# Altium PCB HX-SMJ-03-A.pcbdoc (part 1 of 2)
Units mil, origin at the board's own origin, x right, y up, seen from the top; angles counter-clockwise.
Board outline 10466.23 x 2984.91 mil, 2 copper layers (Top Layer, Bottom Layer); 269 components, 182 nets, 710 pads, 382 vias.
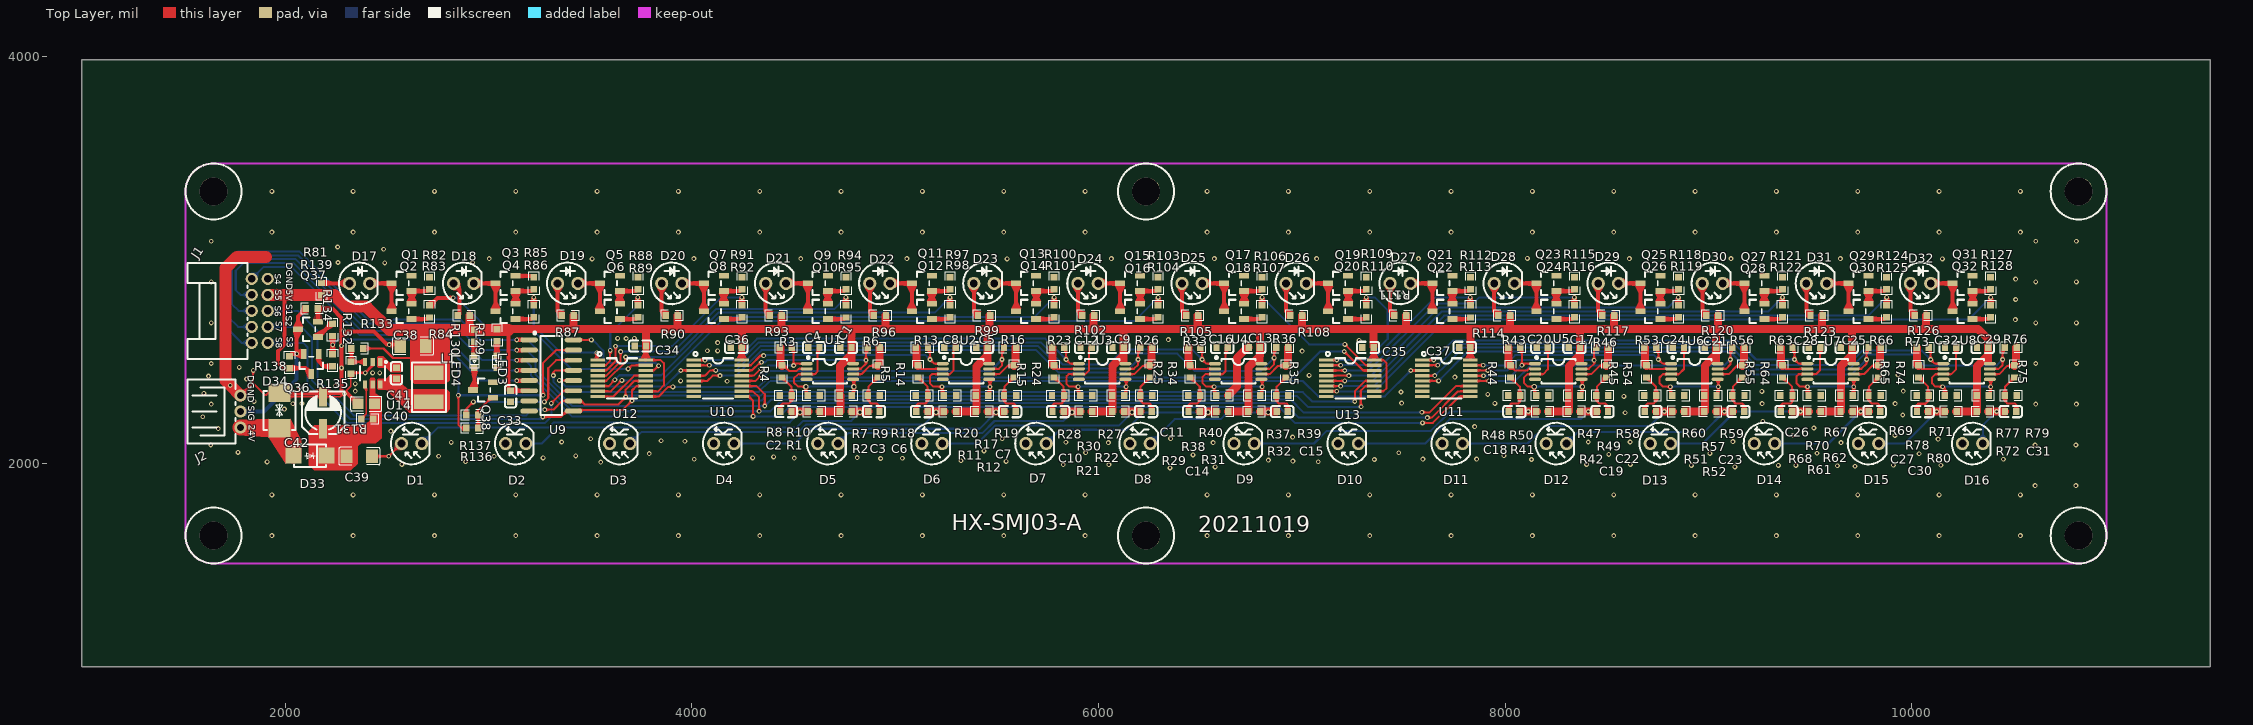
[diagram p0: Top Layer view]
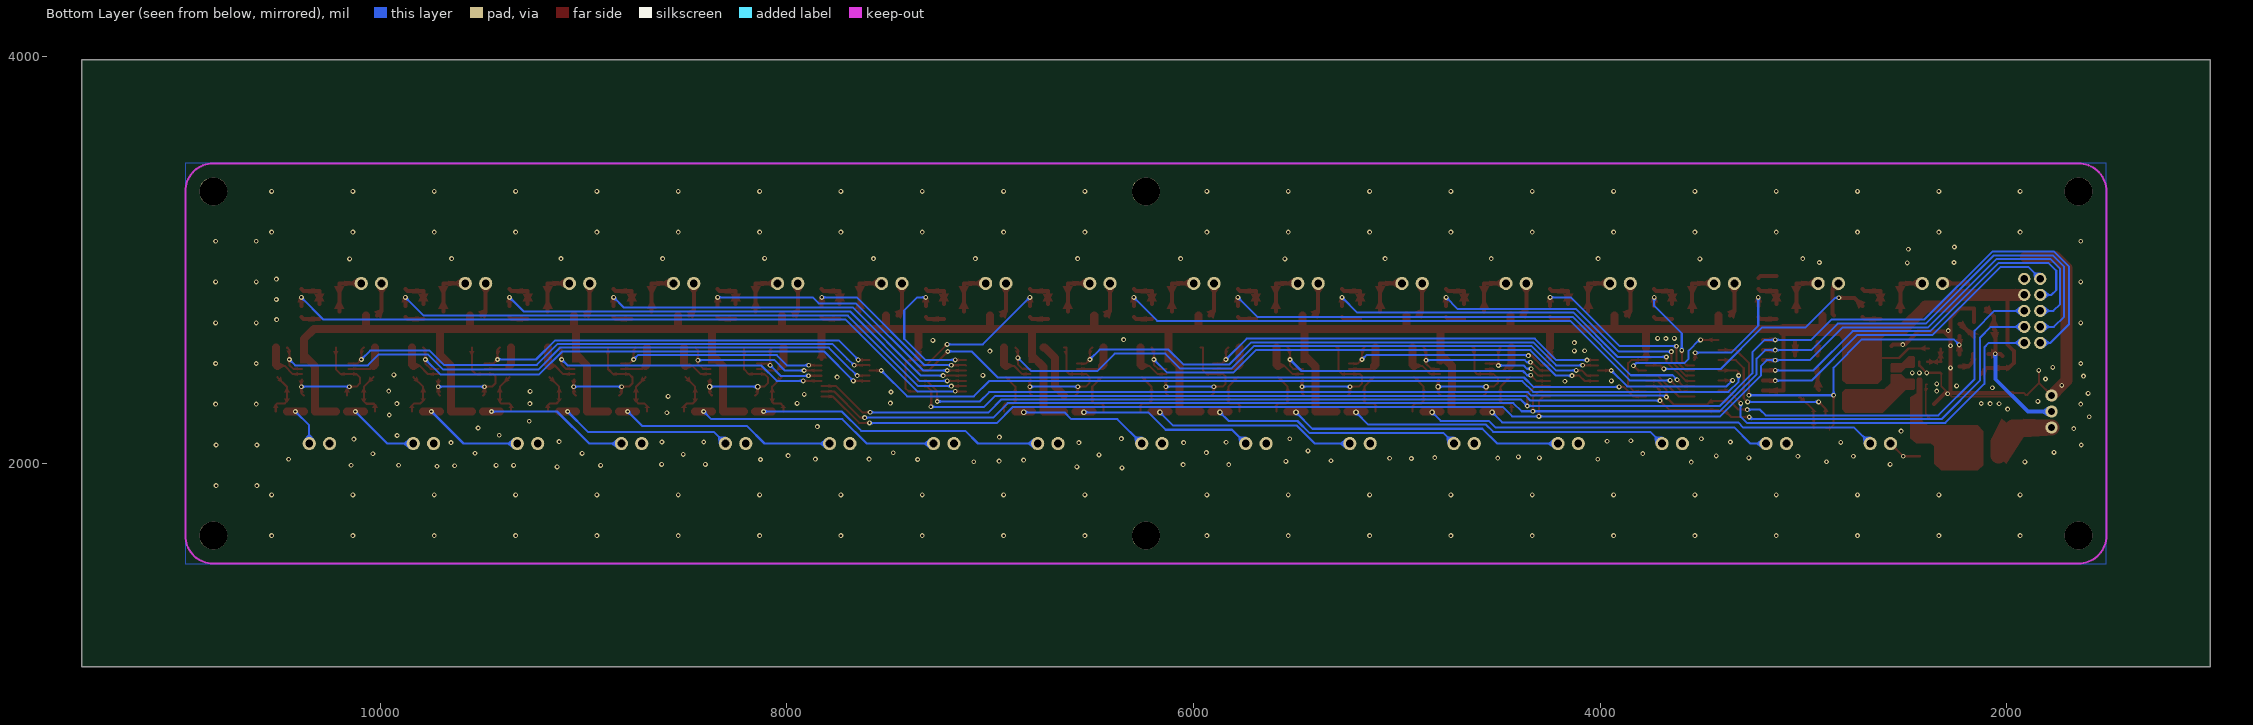
[diagram p1: Bottom Layer view, seen from below]

## Layer stack, top to bottom
Top Layer: signal copper (thickness not stored)
Dielectric: dielectric 12.6, FR-4, Dk 4.8
Bottom Layer: signal copper (thickness not stored)

## Board outline
11466.23,1000 1000,1000 1000,3984.91 11466.23,3984.91

## Components (designator, comment, footprint, x,y, rotation, side; value= is the part's Value field where it differs from the comment)
C1 "100nF" C0603 4757.33,2571.02 r180 top
C2 "1uF" C0603 4462.03,2256.02 r180 top
C3 "1uF" C0603 4895.03,2256.02 r180 top
C4 "100nF" C0603 4599.83,2571.02 r180 top
C5 "100nF" C0603 5426.53,2571.02 r180 top
C6 "1uF" C0603 5131.33,2256.02 r180 top
C7 "1uF" C0603 5564.33,2256.02 r180 top
C8 "100nF" C0603 5269.13,2571.02 r180 top
C9 "100nF" C0603 6095.83,2571.02 r180 top
C10 "1uF" C0603 5800.63,2256.02 r180 top
C11 "1uF" C0603 6233.63,2256.02 r180 top
C12 "100nF" C0603 5938.33,2571.02 r180 top
C13 "100nF" C0603 6765.13,2571.02 r180 top
C14 "1uF" C0603 6469.83,2256.02 r180 top
C15 "1uF" C0603 6902.93,2256.02 r180 top
C16 "100nF" C0603 6607.63,2571.02 r180 top
C17 "100nF" C0603 8339.93,2571.02 r180 top
C18 "1uF" C0603 8044.73,2256.02 r180 top
C19 "1uF" C0603 8477.73,2256.02 r180 top
C20 "100nF" C0603 8182.43,2571.02 r180 top
C21 "100nF" C0603 9009.23,2571.02 r180 top
C22 "1uF" C0603 8713.93,2256.02 r180 top
C23 "1uF" C0603 9147.03,2256.02 r180 top
C24 "100nF" C0603 8851.73,2571.02 r180 top
C25 "100nF" C0603 9678.53,2571.02 r180 top
C26 "1uF" C0603 9383.23,2256.02 r180 top
C27 "1uF" C0603 9816.33,2256.02 r180 top
C28 "100nF" C0603 9521.03,2571.02 r180 top
C29 "100nF" C0603 10347.83,2571.02 r180 top
C30 "1uF" C0603 10052.53,2256.02 r180 top
C31 "1uF" C0603 10485.63,2256.02 r180 top
C32 "100nF" C0603 10190.33,2571.02 r180 top
C33 "100nF" C0603 3108.03,2331.22 r90 top
C34 "100nF" C0603 3746.23,2578 r0 top
C35 "100nF" C0603 7325.23,2571.02 r0 top
C36 "100nF" C0603 4218.03,2571.02 r0 top
C37 "100nF" C0603 7801.13,2571.02 r0 top
C38 "47uF" C1206 2628.23,2578 r0 top
C39 "22uF" C1206 2364.23,2036 r180 top
C40 "100nF" C0805 2398.23,2294 r0 top
C41 "100nF" C0603 2546.23,2444 r270 top
C42 "22uF" CAP-SMD_BD5.0-L5.3-W5.3-FD 2186.23,2250 r90 top
D1 "PT334-6B" IR-5MM/2.54-PT334-6B 2621.44,2098.55 r90 top
D2 "PT334-6B" IR-5MM/2.54-PT334-6B 3133.25,2098.55 r90 top
D3 "PT334-6B" IR-5MM/2.54-PT334-6B 3645.07,2098.55 r90 top
D4 "PT334-6B" IR-5MM/2.54-PT334-6B 4156.88,2098.55 r90 top
D5 "PT334-6B" IR-5MM/2.54-PT334-6B 4668.69,2098.55 r90 top
D6 "PT334-6B" IR-5MM/2.54-PT334-6B 5180.5,2098.55 r90 top
D7 "PT334-6B" IR-5MM/2.54-PT334-6B 5692.31,2098.55 r90 top
D8 "PT334-6B" IR-5MM/2.54-PT334-6B 6204.12,2098.55 r90 top
D9 "PT334-6B" IR-5MM/2.54-PT334-6B 6715.93,2098.55 r90 top
D10 "PT334-6B" IR-5MM/2.54-PT334-6B 7227.74,2098.55 r90 top
D11 "PT334-6B" IR-5MM/2.54-PT334-6B 7739.55,2098.55 r90 top
D12 "PT334-6B" IR-5MM/2.54-PT334-6B 8251.36,2098.55 r90 top
D13 "PT334-6B" IR-5MM/2.54-PT334-6B 8763.18,2098.55 r90 top
D14 "PT334-6B" IR-5MM/2.54-PT334-6B 9274.99,2098.55 r90 top
D15 "PT334-6B" IR-5MM/2.54-PT334-6B 9786.8,2098.55 r90 top
D16 "PT334-6B" IR-5MM/2.54-PT334-6B 10298.6,2098.55 r90 top
D17 "IR333C-A" "IR-5MM/2.54-IR333C-A COPY" 2365.54,2885.96 r90 top
D18 "IR333C-A" "IR-5MM/2.54-IR333C-A COPY" 2877.35,2885.96 r90 top
D19 "IR333C-A" "IR-5MM/2.54-IR333C-A COPY" 3389.17,2885.96 r90 top
D20 "IR333C-A" "IR-5MM/2.54-IR333C-A COPY" 3900.97,2885.96 r90 top
D21 "IR333C-A" "IR-5MM/2.54-IR333C-A COPY" 4412.77,2885.96 r90 top
D22 "IR333C-A" "IR-5MM/2.54-IR333C-A COPY" 4924.57,2885.96 r90 top
D23 "IR333C-A" "IR-5MM/2.54-IR333C-A COPY" 5436.4,2885.96 r90 top
D24 "IR333C-A" "IR-5MM/2.54-IR333C-A COPY" 5948.21,2885.96 r90 top
D25 "IR333C-A" "IR-5MM/2.54-IR333C-A COPY" 6460.02,2885.96 r90 top
D26 "IR333C-A" "IR-5MM/2.54-IR333C-A COPY" 6971.84,2885.96 r90 top
D27 "IR333C-A" "IR-5MM/2.54-IR333C-A COPY" 7483.65,2885.96 r90 top
D28 "IR333C-A" "IR-5MM/2.54-IR333C-A COPY" 7995.47,2885.96 r90 top
D29 "IR333C-A" "IR-5MM/2.54-IR333C-A COPY" 8507.27,2885.96 r90 top
D30 "IR333C-A" "IR-5MM/2.54-IR333C-A COPY" 9019.07,2885.96 r90 top
D31 "IR333C-A" "IR-5MM/2.54-IR333C-A COPY" 9530.87,2885.96 r90 top
D32 "IR333C-A" "IR-5MM/2.54-IR333C-A COPY" 10042.7,2885.96 r90 top
D33 "SS24" SMA_L4.3-W2.6-LS5.2-FD 2121.23,2039 r0 top
D34 "P6SMB24CA" SMB_L4.6-W3.6-LS5.3-BI 1971.23,2261 r270 top
J1 "PHB-2*5AW" CONN-TH_PHB-2*5AW 1874.23,2750.96 r90 top
J2 "PH-3AW" CONN-TH_PH-3AW 1779.26,2256.06 r270 top
L1 "4.7uH" 4030 2706.23,2375 r90 top
LED3 "D-G060306G1-KS2" LED_0603 3040.23,2501 r270 top
LED4 "D-G060306G1-KS2" LED_0603 2930.23,2501 r270 top
Q1 "S9014" SOT-23(SOT-23-3) 2572.23,2885.97 r90 top
Q2 "S9014" SOT-23(SOT-23-3) 2572.23,2748.17 r90 top
Q3 "S9014" SOT-23(SOT-23-3) 3084.04,2885.97 r90 top
Q4 "S9014" SOT-23(SOT-23-3) 3084.04,2748.17 r90 top
Q5 "S9014" SOT-23(SOT-23-3) 3595.85,2885.97 r90 top
Q6 "S9014" SOT-23(SOT-23-3) 3595.85,2748.17 r90 top
Q7 "S9014" SOT-23(SOT-23-3) 4107.66,2885.97 r90 top
Q8 "S9014" SOT-23(SOT-23-3) 4107.66,2748.17 r90 top
Q9 "S9014" SOT-23(SOT-23-3) 4619.48,2885.96 r90 top
Q10 "S9014" SOT-23(SOT-23-3) 4619.48,2748.17 r90 top
Q11 "S9014" SOT-23(SOT-23-3) 5131.28,2885.97 r90 top
Q12 "S9014" SOT-23(SOT-23-3) 5131.28,2748.18 r90 top
Q13 "S9014" SOT-23(SOT-23-3) 5643.1,2885.97 r90 top
Q14 "S9014" SOT-23(SOT-23-3) 5643.1,2748.17 r90 top
Q15 "S9014" SOT-23(SOT-23-3) 6154.91,2885.97 r90 top
Q16 "S9014" SOT-23(SOT-23-3) 6154.9,2748.17 r90 top
Q17 "S9014" SOT-23(SOT-23-3) 6666.71,2885.97 r90 top
Q18 "S9014" SOT-23(SOT-23-3) 6666.71,2748.17 r90 top
Q19 "S9014" SOT-23(SOT-23-3) 7178.53,2885.97 r90 top
Q20 "S9014" SOT-23(SOT-23-3) 7178.53,2748.17 r90 top
Q21 "S9014" SOT-23(SOT-23-3) 7690.34,2885.97 r90 top
Q22 "S9014" SOT-23(SOT-23-3) 7690.34,2748.17 r90 top
Q23 "S9014" SOT-23(SOT-23-3) 8202.15,2885.97 r90 top
Q24 "S9014" SOT-23(SOT-23-3) 8202.15,2748.17 r90 top
Q25 "S9014" SOT-23(SOT-23-3) 8713.96,2885.97 r90 top
Q26 "S9014" SOT-23(SOT-23-3) 8713.97,2748.17 r90 top
Q27 "S9014" SOT-23(SOT-23-3) 9225.78,2885.97 r90 top
Q28 "S9014" SOT-23(SOT-23-3) 9225.77,2748.17 r90 top
Q29 "S9014" SOT-23(SOT-23-3) 9737.58,2885.97 r90 top
Q30 "S9014" SOT-23(SOT-23-3) 9737.58,2748.17 r90 top
Q31 "S9014" SOT-23(SOT-23-3) 10249.4,2885.97 r90 top
Q32 "S9014" SOT-23(SOT-23-3) 10249.4,2748.17 r90 top
Q36 "NCE3401" SOT-23-3_L2.9-W1.6-P1.90-LS2.8-BR 2127.23,2490 r90 top
Q37 "NCE3400" SOT-23-3_L2.9-W1.6-P1.90-LS2.8-BR 2112.23,2660 r0 top
Q38 "NCE3400" SOT-23-3_L2.9-W1.6-P1.90-LS2.8-BR 2973.23,2362 r0 top
R1 "8.2K" R0603 4599.83,2256.02 r180 top
R2 "8.2K" R0603 4757.33,2256.02 r0 top
R3 "100K" R0603 4462.03,2571.02 r180 top
R4 "1K" R0603 4442.33,2452.92 r270 top
R5 "1K" R0603 4914.73,2452.92 r90 top
R6 "100K" R0603 4895.03,2571.02 r180 top
R7 "24K" R0603 4757.33,2334.72 r180 top
R8 "100K" R0603 4462.03,2334.72 r0 top
R9 "100K" R0603 4895.03,2334.72 r180 top
R10 "3K" R0603 4599.83,2334.72 r0 top
R11 "8.2K" R0603 5269.13,2256.02 r180 top
R12 "8.2K" R0603 5426.53,2256.02 r0 top
R13 "100K" R0603 5131.33,2571.02 r180 top
R14 "1K" R0603 5111.63,2452.92 r270 top
R15 "1K" R0603 5584.03,2452.92 r90 top
R16 "100K" R0603 5564.33,2571.02 r180 top
R17 "24K" R0603 5426.53,2334.82 r180 top
R18 "100K" R0603 5131.33,2334.82 r0 top
R19 "100K" R0603 5564.33,2334.82 r180 top
R20 "3K" R0603 5269.13,2334.82 r0 top
R21 "8.2K" R0603 5938.33,2256.02 r180 top
R22 "8.2K" R0603 6095.83,2256.02 r0 top
R23 "100K" R0603 5800.63,2571.02 r180 top
R24 "1K" R0603 5780.93,2452.92 r270 top
R25 "1K" R0603 6253.33,2452.92 r90 top
R26 "100K" R0603 6233.63,2571.02 r180 top
R27 "24K" R0603 6095.83,2334.72 r180 top
R28 "100K" R0603 5800.53,2334.72 r0 top
R29 "100K" R0603 6233.63,2334.72 r180 top
R30 "3K" R0603 5938.33,2334.72 r0 top
R31 "8.2K" R0603 6607.63,2256.02 r180 top
R32 "8.2K" R0603 6765.13,2256.02 r0 top
R33 "100K" R0603 6469.83,2571.02 r180 top
R34 "1K" R0603 6450.23,2452.92 r270 top
R35 "1K" R0603 6922.63,2452.92 r90 top
R36 "100K" R0603 6902.93,2571.02 r180 top
R37 "24K" R0603 6765.13,2334.72 r180 top
R38 "100K" R0603 6469.83,2334.72 r0 top
R39 "100K" R0603 6902.93,2334.72 r180 top
R40 "3K" R0603 6607.63,2334.72 r0 top
R41 "8.2K" R0603 8182.53,2256.02 r180 top
R42 "8.2K" R0603 8339.93,2256.02 r0 top
R43 "100K" R0603 8044.73,2571.02 r180 top
R44 "1K" R0603 8025.03,2452.92 r270 top
R45 "1K" R0603 8497.43,2452.92 r90 top
R46 "100K" R0603 8477.73,2571.02 r180 top
R47 "24K" R0603 8339.93,2334.72 r180 top
R48 "100K" R0603 8044.73,2334.72 r0 top
R49 "100K" R0603 8477.73,2334.72 r180 top
R50 "3K" R0603 8182.43,2334.72 r0 top
R51 "8.2K" R0603 8851.73,2256.02 r180 top
R52 "8.2K" R0603 9009.23,2256.02 r0 top
R53 "100K" R0603 8713.93,2571.02 r180 top
R54 "1K" R0603 8694.33,2452.92 r270 top
R55 "1K" R0603 9166.73,2452.92 r90 top
R56 "100K" R0603 9147.03,2571.02 r180 top
R57 "24K" R0603 9009.23,2334.72 r180 top
R58 "100K" R0603 8713.93,2334.72 r0 top
R59 "100K" R0603 9147.03,2334.72 r180 top
R60 "3K" R0603 8851.73,2334.72 r0 top
R61 "8.2K" R0603 9521.03,2256.02 r180 top
R62 "8.2K" R0603 9678.53,2256.02 r0 top
R63 "100K" R0603 9383.23,2571.02 r180 top
R64 "1K" R0603 9363.53,2452.92 r270 top
R65 "1K" R0603 9836.03,2452.92 r90 top
R66 "100K" R0603 9816.33,2571.02 r180 top
R67 "24K" R0603 9678.53,2334.82 r180 top
R68 "100K" R0603 9383.23,2334.82 r0 top
R69 "100K" R0603 9816.33,2334.82 r180 top
R70 "3K" R0603 9521.03,2334.82 r0 top
R71 "8.2K" R0603 10190.33,2256.02 r180 top
R72 "8.2K" R0603 10347.83,2256.02 r0 top
R73 "100K" R0603 10052.53,2571.02 r180 top
R74 "1K" R0603 10032.83,2452.92 r270 top
R75 "1K" R0603 10505.33,2452.92 r90 top
R76 "100K" R0603 10485.63,2571.02 r180 top
R77 "24K" R0603 10347.83,2334.72 r180 top
R78 "100K" R0603 10052.53,2334.72 r0 top
R79 "100K" R0603 10485.63,2334.72 r180 top
R80 "3K" R0603 10190.33,2334.72 r0 top
R81 "91" R0603 2178.53,2858.41 r90 top
R82 "1K" R0603 2710.03,2885.92 r90 top
R83 "22K" R0603 2710.03,2748.12 r270 top
R84 "91" R0603 2877.33,2728.52 r180 top
R85 "1K" R0603 3221.83,2885.92 r90 top
R86 "22K" R0603 3221.83,2748.22 r270 top
R87 "91" R0603 3389.13,2728.52 r180 top
R88 "1K" R0603 3733.63,2885.92 r90 top
R89 "22K" R0603 3733.63,2748.22 r270 top
R90 "91" R0603 3900.93,2728.52 r180 top
R91 "1K" R0603 4245.43,2885.92 r90 top
R92 "22K" R0603 4245.43,2748.22 r270 top
R93 "91" R0603 4412.83,2728.52 r180 top
R94 "1K" R0603 4757.23,2885.92 r90 top
R95 "22K" R0603 4757.23,2748.12 r270 top
R96 "91" R0603 4924.63,2728.52 r180 top
R97 "1K" R0603 5269.03,2885.92 r90 top
R98 "22K" R0603 5269.03,2748.22 r270 top
R99 "91" R0603 5436.43,2728.52 r180 top
R100 "1K" R0603 5780.93,2885.92 r90 top
R101 "22K" R0603 5780.93,2748.22 r270 top
R102 "91" R0603 5948.23,2728.52 r180 top
R103 "1K" R0603 6292.73,2885.92 r90 top
R104 "22K" R0603 6292.73,2748.22 r270 top
R105 "91" R0603 6460.03,2728.52 r180 top
R106 "1K" R0603 6804.53,2885.92 r90 top
R107 "22K" R0603 6804.53,2748.22 r270 top
R108 "91" R0603 6971.83,2728.52 r180 top
R109 "1K" R0603 7316.33,2885.92 r90 top
R110 "22K" R0603 7316.33,2748.22 r270 top
R111 "91" R0603 7483.63,2728.52 r180 top
R112 "1K" R0603 7828.13,2885.92 r90 top
R113 "22K" R0603 7828.13,2748.12 r270 top
R114 "91" R0603 7995.43,2728.52 r180 top
R115 "1K" R0603 8339.93,2885.92 r90 top
R116 "22K" R0603 8339.93,2748.22 r270 top
R117 "91" R0603 8507.23,2728.52 r180 top
R118 "1K" R0603 8851.73,2885.92 r90 top
R119 "22K" R0603 8851.73,2748.22 r270 top
R120 "91" R0603 9019.03,2728.52 r180 top
R121 "1K" R0603 9363.53,2885.92 r90 top
R122 "22K" R0603 9363.53,2748.22 r270 top
R123 "91" R0603 9530.93,2728.52 r180 top
R124 "1K" R0603 9875.33,2885.92 r90 top
R125 "22K" R0603 9875.33,2748.22 r270 top
R126 "91" R0603 10042.73,2728.52 r180 top
R127 "1K" R0603 10387.23,2885.92 r90 top
R128 "22K" R0603 10387.23,2748.22 r270 top
R129 "2K" R0603 3040.23,2631 r90 top
R130 "2K" R0603 2930.23,2628 r90 top
R131 "100K" R0603 2402.23,2219 r180 top
R132 "10.2K" R0603 2322.23,2472 r90 top
R133 "53.6K" R0603 2354.23,2566 r0 top
R134 "1K" R0603 2232.23,2657 r90 top
R135 "1K" R0603 2232.23,2508 r270 top
R136 "1K" R0603 2919.23,2174 r0 top
R137 "1K" R0603 2920.23,2239 r0 top
R138 "10K" R0603 2020.23,2499 r270 top
R139 "10K" R0603 2130.23,2762 r180 top
U1 "LM358PWR" TSSOP-8_L4.4-W3.0-P0.65-LS6.4-BL 4678.51,2452.9 r270 top
U2 "LM358PWR" TSSOP-8_L4.4-W3.0-P0.65-LS6.4-BL 5347.81,2452.9 r270 top
U3 "LM358PWR" TSSOP-8_L4.4-W3.0-P0.65-LS6.4-BL 6017.11,2452.89 r270 top
U4 "LM358PWR" TSSOP-8_L4.4-W3.0-P0.65-LS6.4-BL 6686.42,2452.89 r270 top
U5 "LM358PWR" TSSOP-8_L4.4-W3.0-P0.65-LS6.4-BL 8261.19,2452.89 r270 top
U6 "LM358PWR" TSSOP-8_L4.4-W3.0-P0.65-LS6.4-BL 8930.52,2452.89 r270 top
U7 "LM358PWR" TSSOP-8_L4.4-W3.0-P0.65-LS6.4-BL 9599.78,2452.89 r270 top
U8 "LM358PWR" TSSOP-8_L4.4-W3.0-P0.65-LS6.4-BL 10269.09,2452.88 r270 top
U9 "STC15W204S-35I-SOP16" SOP-16_150MIL 3308.07,2433.2 r0 top
U10 "SN74LV4051APWR" TSSOP-16_L5.0-W4.4-P0.65-LS6.4-BL 4127.35,2419.42 r270 top
U11 "SN74LV4051APWR" TSSOP-16_L5.0-W4.4-P0.65-LS6.4-BL 7710.02,2419.42 r270 top
U12 "SN74HC595PWR" TSSOP-16_L5.0-W4.4-P0.65-LS6.4-BL 3654.91,2419.42 r270 top
U13 "SN74HC595PWR" TSSOP-16_L5.0-W4.4-P0.65-LS6.4-BL 7237.58,2419.42 r270 top
U14 "JW5026" SOT-23-6_L2.9-W1.6-P0.95-LS2.8-BL 2429.23,2445 r180 top

## Footprints (in the part's own frame and the unit in brackets; to place one, negate y for a bottom-side part, rotate by r counter-clockwise, add the part's x,y. Pads: shape width x height; smd on the part's side, far side on the other; paste and mask are expansions set on the pad)
4030 [mm]
  rect 1.8x3.7 smd: 1(-1.8,0) 2(1.8,0)
  silkscreen extent -3.06,-2.11 3.11,2.13
C0603 [mm]
  rect 0.8x0.9 smd: 1(-0.7,0) 2(0.7,0)
  silkscreen extent -1.41,-0.71 1.39,0.72
C0805 [mm]
  rect 1.35x1.35 smd: 1(-1.03,0) 2(1.03,0)
  silkscreen extent -1.96,-0.9 1.96,0.9
C1206 [mm]
  rect 1.485x1.728 smd: 1(-1.593,0) 2(1.593,0)
  silkscreen extent -2.56,-1.09 2.56,1.09
CAP-SMD_BD5.0-L5.3-W5.3-FD [mm]
  rect 2.4x1 smd: 1(-2,0) 2(2,0)
  silkscreen extent -2.65,-2.65 2.65,2.65
CONN-TH_PH-3AW [mil]
  round 60 hole 36: 1(78.75,0) 2(-0.05,0) 3(-78.75,0)
  silkscreen extent -157,-260 157,-24
CONN-TH_PHB-2*5AW [mil]
  round 60 hole 36: 1(-157.48,-39.33) 2(-157.48,39.37) 3(-78.78,-39.33) 4(-78.78,39.37) 5(0,-39.37) 6(0,39.37) 7(78.74,-39.37) 8(78.74,39.37) 9(157.48,-39.37) 10(157.48,39.37)
  silkscreen extent -236,59 236,354
"IR-5MM/2.54-IR333C-A COPY" [mil]
  round 65 hole 38: 1(0,50) 2(0,-50)
  silkscreen extent -102,-88 102,102
IR-5MM/2.54-PT334-6B [mil]
  round 65 hole 38: 1(0,50) 2(0,-50)
  silkscreen extent -102,-88 102,102
LED_0603 [mil]
  rect 31.9x31.9 smd: 1(-30,0) 2(30,0)
  silkscreen extent -32,-20 32,20
R0603 [mil]
  rect 31.75x34.02 smd: 1(-29.65,0) 2(29.65,0)
  silkscreen extent -55,-26 55,26
SMA_L4.3-W2.6-LS5.2-FD [mm]
  rect 2x2 smd: 1(-2.057,0) 2(2.057,0)
  silkscreen extent -2.01,-1.4 2.03,1.4
SMB_L4.6-W3.6-LS5.3-BI [mm]
  rect 2.3x2.7 smd: 1(-2.2,0) 2(2.2,0)
  silkscreen extent -2.45,-2 2.45,2
SOP-16_150MIL [mm]
  oval 2.2x0.6 smd: 1(-2.769,4.445) 2(-2.769,3.175) 3(-2.769,1.905) 4(-2.769,0.635) 5(-2.769,-0.635) 6(-2.769,-1.905) 7(-2.769,-3.175) 8(-2.769,-4.445) 9(2.769,-4.445) 10(2.769,-3.175) 11(2.769,-1.905) 12(2.769,-0.635) 13(2.769,0.635) 14(2.769,1.905) 15(2.769,3.175) 16(2.769,4.445)
  silkscreen extent -2.21,-4.95 1.35,5.46
SOT-23(SOT-23-3) [mm]
  rect 0.7x1.25 smd: 1(-0.95,-1.25) 2(0.95,-1.25) 3(0,1.25)
  silkscreen extent -1.46,-0.9 1.46,0.65
SOT-23-3_L2.9-W1.6-P1.90-LS2.8-BR [mm]
  rect 1.25x0.7 smd: 1(1.25,-0.95) 2(1.25,0.95) 3(-1.25,0)
  silkscreen extent -0.65,-1.46 0.9,1.46
SOT-23-6_L2.9-W1.6-P0.95-LS2.8-BL [mm]
  rect 0.55x1 smd: 1(-0.95,-1.4) 2(0,-1.4) 3(0.95,-1.4) 4(0.95,1.4) 5(0,1.4) 6(-0.95,1.4)
  silkscreen extent -1.78,-1.52 1.55,0.9
TSSOP-8_L4.4-W3.0-P0.65-LS6.4-BL [mm]
  oval 0.4x1.5 smd: 1(-0.975,-2.9) 2(-0.325,-2.9) 3(0.325,-2.9) 4(0.975,-2.9) 5(0.975,2.9) 6(0.325,2.9) 7(-0.325,2.9) 8(-0.975,2.9)
  silkscreen extent -1.89,-2.87 1.49,2.16
TSSOP-16_L5.0-W4.4-P0.65-LS6.4-BL [mil]
  rect 16x71 smd: 1(-89.57,-118.11) 2(-63.98,-118.11) 3(-38.39,-118.11) 4(-12.8,-118.11) 5(12.79,-118.11) 6(38.39,-118.11) 7(63.98,-118.11) 8(89.57,-118.11) 9(89.57,118.11) 10(63.98,118.11) 11(38.39,118.11) 12(12.79,118.11) 13(-12.8,118.11) 14(-38.39,118.11) 15(-63.98,118.11) 16(-89.57,118.11)
  silkscreen extent -130,-120 98,74

## Free pads (board coordinates)
  round 137.8 hole 137.8 unplated: ""(1647.03,1645.8) ""(1647.03,3338.71) ""(6233.64,1645.8) ""(6233.64,3338.71) ""(10820.26,1645.8) ""(10820.26,3338.71)

## Via types
v1: diameter 24, hole 12, Top Layer to Bottom Layer, 370 vias
v2: diameter 27.56, hole 15.75, Top Layer to Bottom Layer, 12 vias

## Nets (pads, with @x,y where several pads share a name; then routed paths per layer and width w, separated by ;. In a path a pad name is that pad's centre, name@x,y a point inside that pad or via, vN(x,y) a via of type N, cw(c..) or ccw(c..) an arc to the next point about the centre after c; other vN are vias at no path point)
A: J1.2 U9.1 U10.11 U11.11 | length 7345.6
  Top Layer w10: U10.11@4245.43,2381.02 4318.33,2381.02 4358.03,2341.22 v1@4358.03,2283.22 ; v1@7590.03,2252.22 7628.03,2252.22 7756.93,2381.12 U11.11@7828.13,2381.12
  Top Layer w19.68: v1@3138.03,2608.22 U9.1@3199.03,2608.22
  Bottom Layer w10: J1.2@1834.83,2593.52 1784.73,2593.52 1694.23,2684.02 1694.23,2970.02 1768.23,3044.02 2069.23,3044.02 2404.23,2709.02 2861.23,2709.02 2961.93,2608.22 v1@3138.03,2608.22 ; v1@3138.03,2608.32 3190.93,2608.32 3251.03,2548.12 3251.03,2444.22 3412.03,2283.22 v1@4358.03,2283.22 ; v1(4358.07,2283.26) 4390.1,2315.28 6944.08,2315.28 7007.11,2252.26 v1(7590.07,2252.26)
  other v1: 3138.07,2608.26
B: J1.4 U9.2 U10.10 U11.10 | length 7205.5
  Top Layer w10: U10.10@4245.43,2355.42 4299.93,2355.42 4330.03,2325.22 v1@4330.03,2257.22 ; v1@7617.03,2226.22 7638.53,2226.22 7767.73,2355.42 U11.10@7828.14,2355.45
  Top Layer w19.68: v1@3138.03,2558.22 U9.2@3199.03,2558.22
  Bottom Layer w10: J1.4@1834.83,2672.22 1768.03,2672.22 1717.23,2723.02 1717.23,2967.02 1774.23,3024.02 2062.23,3024.02 2398.23,2688.02 2831.23,2688.02 2961.03,2558.22 3138.03,2558.22 3188.03,2558.22 3230.23,2516.02 3230.23,2439.12 3412.03,2257.22 v1@4330.03,2257.22 ; v1(4330.07,2257.26) 4386.05,2257.26 4426.08,2297.28 6913.08,2297.28 6984.11,2226.25 v1(7617.07,2226.26)
  other v1: 3138.07,2558.22
C: J1.6 U9.3 U10.9 U11.9 | length 7051.7
  Top Layer w10: U10.9@4245.43,2329.92 4279.43,2329.92 4301.03,2308.32 v1@4301.03,2232.22 ; v1@7593.03,2200.32 7644.03,2200.32 7773.63,2329.92 U11.9@7828.14,2329.85
  Top Layer w19.68: v1@3138.03,2508.22 U9.3@3199.03,2508.22
  Bottom Layer w10: J1.6@1834.83,2751.02 1770.23,2751.02 1737.23,2784.02 1737.23,2958.02 1784.23,3005.02 2051.23,3005.02 2386.23,2670.02 2806.23,2670.02 2968.03,2508.22 3138.03,2508.22 3180.03,2508.22 3209.23,2479.02 3209.23,2432.02 3408.93,2232.22 v1@4301.03,2232.22 ; v1(4301.07,2232.26) 4432.45,2232.26 4479.48,2279.28 6887.08,2279.28 6967.11,2199.26 7592.07,2199.26 v1(7593.07,2200.26)
  other v1: 3138.07,2508.18
C2_1: C2.1 D1.2 R1.2 | length 2005.8
  Top Layer w39.37: C2.1@4489.53,2256.02 4529.43,2256.02 R1.2@4572.23,2256.02
  Bottom Layer w10: D1.2@2671.44,2098.55 2749.93,2177.02 3295.83,2177.02 3321.03,2202.32 4481.03,2202.32 v2(4530.88,2252.1)
C7_1: C7.1 R15.1 R19.2 | length 233.3
  Top Layer w10: R15.1@5584.03,2425.32 5536.83,2378.12 5536.83,2334.82 5536.83,2305.32 5546.53,2295.52 5583.53,2295.52 5591.93,2287.12 C7.1@5591.89,2256.02
C11_1: C11.1 R25.1 R29.2 | length 229.2
  Top Layer w10: R25.1@6253.33,2425.32 6206.13,2378.12 6206.13,2334.72 6206.13,2310.02 6220.53,2295.52 6250.53,2295.52 6261.23,2284.92 C11.1@6261.19,2256.02
C15_1: C15.1 R35.1 R39.2 | length 234
  Top Layer w10: R35.1@6922.63,2425.32 6875.43,2378.02 6875.43,2334.72 6875.43,2305.72 6885.93,2295.22 6924.13,2295.22 6930.53,2288.82 C15.1@6930.49,2256.02
C19_1: C19.1 R45.1 R49.2 | length 229.2
  Top Layer w10: R45.1@8497.43,2425.32 8450.23,2378.02 8450.23,2334.72 8450.23,2307.62 8462.53,2295.22 8492.53,2295.22 8505.33,2282.42 C19.1@8505.29,2256.02
C23_1: C23.1 R55.1 R59.2 | length 231
  Top Layer w10: R55.1@9166.73,2425.32 9119.53,2378.12 9119.53,2334.72 9119.53,2308.32 9132.53,2295.22 9165.53,2295.22 9174.63,2286.22 C23.1@9174.59,2256.02
C27_1: C27.1 R65.1 R69.2 | length 229.9
  Top Layer w10: R65.1@9836.03,2425.32 9788.73,2378.12 9788.73,2334.72 9788.73,2309.02 9801.53,2296.22 9832.53,2296.22 9843.83,2284.92 C27.1@9843.83,2256.02
C31_1: C31.1 R75.1 R79.2 | length 233.5
  Top Layer w10: R75.1@10505.33,2425.32 10458.03,2378.02 10458.03,2334.72 10458.03,2306.22 10468.03,2296.22 10505.03,2296.22 10513.23,2288.12 C31.1@10513.19,2256.02
D3_2: C6.1 D3.2 R11.2 | length 1651.4
  Top Layer w39.37: C6.1@5158.83,2256.02 R11.2@5241.53,2256.02
  Bottom Layer w10: D3.2@3695.07,2098.55 3752.78,2156.29 4526.08,2156.29 4561.08,2191.29 5139.39,2191.29 v2(5200.18,2252.1)
D4_2: C7.2 D4.2 R12.2 | length 1434.9
  Top Layer w39.37: R12.2@5454.13,2256.02 C7.2@5536.78,2256.02
  Bottom Layer w10: D4.2@4206.88,2098.55 4506.38,2098.59 4579.08,2171.29 5414.68,2171.29 v2(5495.45,2252.1)
D5_2: C10.1 D5.2 R21.2 | length 1297.1
  Top Layer w39.37: C10.1@5828.13,2256.02 R21.2@5910.83,2256.02
  Bottom Layer w10: D5.2@4718.69,2098.55 4769.39,2149.28 5428.08,2149.28 5488.08,2209.28 5826.66,2209.28 v2(5869.47,2252.1)
D6_2: C11.2 D6.2 R22.2 | length 1080.6
  Top Layer w39.37: R22.2@6123.43,2256.02 C11.2@6206.08,2256.02
  Bottom Layer w10: D6.2@5230.5,2098.55 5403.39,2098.59 5493.08,2188.28 6100.93,2188.28 v2(6164.74,2252.1)
D7_2: C14.1 D7.2 R31.2 | length 942.8
  Top Layer w39.37: C14.1@6497.39,2256.02 R31.2@6580.13,2256.02
  Bottom Layer w10: D7.2@5742.31,2098.55 5809.98,2166.29 6136.08,2166.29 6221.89,2252.08 v2(6538.76,2252.1)
D8_2: C15.2 D8.2 R32.2 | length 726.3
  Top Layer w39.37: R32.2@6792.73,2256.02 C15.2@6875.38,2256.02
  Bottom Layer w10: D8.2@6254.12,2098.55 6373.78,2218.28 6600.08,2218.28 6633.88,2252.08 v2@6834.08,2252.08
  other v2: 6834.04,2252.1
D9_2: C18.1 D9.2 R41.2 | length 1495.5
  Top Layer w39.37: C18.1@8072.23,2256.02 8114.33,2256.02 R41.2@8154.93,2256.02
  Bottom Layer w10: D9.2@6765.93,2098.55 7059.43,2098.62 7121.83,2161.02 7633.83,2161.02 7728.73,2256.02 v1@8113.53,2256.02
  other v1: 8113.56,2256.03
D10_2: C19.2 D10.2 R42.2 | length 1279
  Top Layer w39.37: R42.2@8367.53,2256.02 8408.43,2256.02 C19.2@8450.18,2256.02
  Bottom Layer w10: D10.2@7277.74,2098.55 7606.37,2098.55 7726.07,2218.26 8371.08,2218.26 v1(8408.84,2256.03)
D11_2: C22.1 D11.2 R51.2 | length 1141.2
  Top Layer w39.37: C22.1@8741.49,2256.02 8783.13,2256.02 R51.2@8824.23,2256.02
  Bottom Layer w10: D11.2@7789.55,2098.55 8109.37,2098.55 8196.07,2185.26 8712.09,2185.26 v1(8782.85,2256.03)
D12_2: C23.2 D12.2 R52.2 | length 924.7
  Top Layer w39.37: R52.2@9036.83,2256.02 9077.53,2256.02 C23.2@9119.48,2256.02
  Bottom Layer w10: D12.2@8301.36,2098.55 8359.05,2156.25 8978.36,2156.25 v1(9078.13,2256.04)
D13_2: C26.1 D13.2 R61.2 | length 786.8
  Top Layer w39.37: C26.1@9410.83,2256.12 9451.53,2256.02 R61.2@9493.43,2256.02
  Bottom Layer w10: D13.2@8813.18,2098.55 8972.38,2098.59 9129.88,2255.99 v1(9452.15,2256.04)
D14_2: C27.2 D14.2 R62.2 | length 570.4
  Top Layer w39.37: R62.2@9706.03,2256.02 9747.53,2256.02 C27.2@9788.73,2256.12
  Bottom Layer w10: D14.2@9324.99,2098.55 9589.94,2098.55 v1(9747.42,2256.04)
D15_2: C30.1 D15.2 R71.2 | length 432.5
  Top Layer w39.37: C30.1@10080.13,2256.12 10121.23,2256.02 R71.2@10162.73,2256.02
  Bottom Layer w10: D15.2@9836.8,2098.55 9963.97,2098.55 v1(10121.44,2256.04)
D16_2: C31.2 D16.2 R72.2 | length 268.4
  Top Layer w39.37: R72.2@10375.33,2256.02 10415.73,2256.02 C31.2@10458.03,2256.02
  Bottom Layer w10: D16.2@10348.6,2098.55 10348.6,2187.92 v1(10416.71,2256.03)
D18_1: D18.1 R84.2 | length 172.9
  Top Layer w19.68: D18.1@2827.35,2885.96 2857.13,2856.22 2857.13,2735.82 R84.2@2849.83,2728.52
D18_2: D18.2 Q3.3 Q4.3 | length 245.2
  Top Layer w19.68: D18.2@2927.33,2885.92 3034.83,2885.92 Q4.3@3034.84,2748.17
D19_1: D19.1 R87.2 | length 166.7
  Top Layer w19.68: D19.1@3339.13,2885.92 3339.13,2750.92 R87.2@3361.63,2728.52
D19_2: D19.2 Q5.3 Q6.3 | length 245.2
  Top Layer w19.68: D19.2@3439.13,2885.92 3546.63,2885.92 Q6.3@3546.63,2748.22
D20_1: D20.1 R90.2 | length 166.7
  Top Layer w19.68: D20.1@3850.93,2885.92 3850.93,2750.92 R90.2@3873.43,2728.52
D20_2: D20.2 Q7.3 Q8.3 | length 245.2
  Top Layer w19.68: D20.2@3950.93,2885.92 4058.43,2885.92 Q8.3@4058.43,2748.22
D21_1: D21.1 R93.2 | length 166.7
  Top Layer w19.68: D21.1@4362.73,2885.92 4362.73,2750.92 R93.2@4385.23,2728.52
D21_2: D21.2 Q9.3 Q10.3 | length 245.3
  Top Layer w19.68: D21.2@4462.73,2885.92 Q9.3@4570.23,2885.92 ; Q10.3@4570.33,2748.12 Q9.3@4570.33,2885.92
D22_1: D22.1 R96.2 | length 166.7
  Top Layer w19.68: D22.1@4874.53,2885.92 4874.53,2750.92 R96.2@4897.03,2728.52
D22_2: D22.2 Q11.3 Q12.3 | length 245.2
  Top Layer w19.68: D22.2@4974.63,2885.92 5082.13,2885.92 Q12.3@5082.08,2748.17
D23_1: D23.1 R99.2 | length 166.7
  Top Layer w19.68: D23.1@5386.43,2885.92 5386.43,2750.92 R99.2@5408.83,2728.52
D23_2: D23.2 Q13.3 Q14.3 | length 245.2
  Top Layer w19.68: D23.2@5486.43,2885.92 5593.93,2885.92 Q14.3@5593.9,2748.17
D24_1: D24.1 R102.2 | length 166.7
  Top Layer w19.68: D24.1@5898.23,2885.92 5898.23,2750.92 R102.2@5920.63,2728.52
D24_2: D24.2 Q15.3 Q16.3 | length 245.2
  Top Layer w19.68: D24.2@5998.23,2885.92 6105.73,2885.92 Q16.3@6105.7,2748.17
D25_1: D25.1 R105.2 | length 166.7
  Top Layer w19.68: D25.1@6410.03,2885.92 6410.03,2750.92 R105.2@6432.43,2728.42
D25_2: D25.2 Q17.3 Q18.3 | length 245.3
  Top Layer w19.68: D25.2@6510.03,2885.92 6617.53,2885.92 Q18.3@6617.43,2748.12
D26_1: D26.1 R108.2 | length 166.7
  Top Layer w19.68: D26.1@6921.83,2885.92 6921.83,2750.92 R108.2@6944.23,2728.52
D26_2: D26.2 Q19.3 Q20.3 | length 245.3
  Top Layer w19.68: D26.2@7021.83,2885.92 Q19.3@7129.33,2885.92 ; Q20.3@7129.23,2748.22 Q19.3@7129.43,2886.02
D27_1: D27.1 R111.2 | length 166.7
  Top Layer w19.68: D27.1@7433.63,2885.92 7433.63,2750.92 R111.2@7456.13,2728.52
D27_2: D27.2 Q21.3 Q22.3 | length 245.3
  Top Layer w19.68: D27.2@7533.63,2885.92 7641.13,2885.92 Q22.3@7641.13,2748.12
D28_1: D28.1 R114.2 | length 166.7
  Top Layer w19.68: D28.1@7945.43,2885.92 7945.43,2750.92 R114.2@7967.93,2728.52
D28_2: D28.2 Q23.3 Q24.3 | length 245.2
  Top Layer w19.68: D28.2@8045.43,2885.92 8152.93,2885.92 Q24.3@8152.95,2748.17
D29_1: D29.1 R117.2 | length 166.7
  Top Layer w19.68: D29.1@8457.23,2885.92 8457.23,2750.92 R117.2@8479.73,2728.52
D29_2: D29.2 Q25.3 Q26.3 | length 245.2
  Top Layer w19.68: D29.2@8557.23,2885.92 8664.73,2885.92 Q26.3@8664.73,2748.22
D30_1: D30.1 R120.2 | length 166.7
  Top Layer w19.68: D30.1@8969.03,2885.92 8969.03,2750.92 R120.2@8991.53,2728.52
D30_2: D30.2 Q27.3 Q28.3 | length 245.2
  Top Layer w19.68: D30.2@9069.03,2885.92 9176.53,2885.92 Q28.3@9176.53,2748.22
D31_1: D31.1 R123.2 | length 166.7
  Top Layer w19.68: D31.1@9480.83,2885.92 9480.83,2750.92 R123.2@9503.33,2728.52
D31_2: D31.2 Q29.3 Q30.3 | length 245.3
  Top Layer w19.68: D31.2@9580.83,2885.92 9688.43,2885.92 Q30.3@9688.38,2748.17
D32_1: D32.1 R126.2 | length 166.7
  Top Layer w19.68: D32.1@9992.73,2885.92 9992.73,2750.92 R126.2@10015.13,2728.52
D32_2: D32.2 Q31.3 Q32.3 | length 245.2
  Top Layer w19.68: D32.2@10092.73,2885.92 10200.23,2885.92 Q32.3@10200.19,2748.17
GND: C1.2 C4.2 C5.2 C8.2 C9.2 C12.2 C13.2 C16.2 C17.2 C20.2 C21.2 C24.2 C25.2 C28.2 C29.2 C32.2 C33.1 C34.1 C35.1 C36.1 C37.1 C38.1 C39.1 C40.1 C42.2 D1.1 D2.1 D3.1 D4.1 D5.1 D6.1 D7.1 D8.1 D9.1 D10.1 D11.1 D12.1 D13.1 D14.1 D15.1 D16.1 D34.1 J1.9 J2.3 LED3.2 Q1.2 Q3.2 Q5.2 Q7.2 Q9.2 Q11.2 Q13.2 Q15.2 Q17.2 Q19.2 Q21.2 Q23.2 Q25.2 Q27.2 Q29.2 Q31.2 Q37.2 Q38.2 R8.1 R9.1 R10.2 R18.1 R19.1 R20.2 R28.1 R29.1 R30.2 R38.1 R39.1 R40.2 R48.1 R49.1 R50.2 R58.1 R59.1 R60.2 R68.1 R69.1 R70.2 R78.1 R79.1 R80.2 R82.2 R85.2 R88.2 R91.2 R94.2 R97.2 R100.2 R103.2 R106.2 R109.2 R112.2 R115.2 R118.2 R121.2 R124.2 R127.2 R132.1 R139.1 U1.4 U2.4 U3.4 U4.4 U5.4 U6.4 U7.4 U8.4 U9.8 U10.6 U10.7 U10.8 U11.6 U11.7 U11.8 U12.8 U12.13 U13.8 U13.13 U14.2 | length 3984.6
  Top Layer w7.87: C42.2@2186.23,2328.74 2270.93,2328.72 2322.23,2380.02 R132.1@2322.23,2442.34
  Top Layer w10: J2.3@1779.22,2334.74 1842.23,2397.75 v1(1842.23,2458) 1842.23,2394.22 1898.84,2337.61 ; 1906.83,2337.62 1916.83,2347.62 D34.1@1971.23,2347.61 1971.23,2328.72 C42.2@2186.23,2328.74 ; C39.1@2426.93,2036 v1(2508.89,2036) ; v1(2508.89,2036) D1.1@2571.44,2098.55 ; U12.8@3536.73,2329.92 3613.63,2329.92 3716.03,2432.22 U12.13@3772.93,2432.22
  Top Layer w11.81: R132.1@2322.23,2442.34 2325.93,2446.02 v1(2393.23,2446) 2429.23,2482.02 U14.2@2429.23,2500.12
  Top Layer w19.68: D34.1@1971.23,2347.61 2304.03,2347.62 C40.1@2357.63,2294.02 ; Q37.2@2161.43,2697.4 2161.43,2760.42 R139.1@2159.89,2762 2231.23,2762.02 2276.23,2717.02 2276.23,2617.02 ; v1@2284.23,2341.02 2276.23,2341.02 v1(2276.23,2470.79) v1(2276.23,2579.58) 2276.23,2617.02 ; C38.1@2565.53,2578 2558.53,2585.02 v1(2511.23,2585) 2501.25,2585 2436.23,2650.02 2309.23,2650.02 2276.23,2617.02 ; Q3.2@3133.23,2923.32 3212.03,2923.32 R85.2@3221.83,2913.52
  Top Layer w39.37: R40.2@6635.23,2334.72 6680.53,2380.12 6680.53,2520.22 6731.23,2571.02 C13.2@6737.58,2571.02
  Top Layer w59.05: v1(1729.23,2384.73) 1706.23,2407.72 1706.23,2962.02 1761.23,3017.02 1904.23,3017.02 ; v1(1729.23,2384.73) J2.3@1779.22,2334.74
  other v1: 1933.64,1645.8 2333.64,1645.8 2733.64,1645.8 3133.64,1645.8 3533.64,1645.8 3933.64,1645.8 4333.64,1645.8 4733.64,1645.8 5133.64,1645.8 5533.64,1645.8 5933.64,1645.8 6533.65,1645.8 6933.65,1645.8 7333.65,1645.8 7733.65,1645.8 8133.65,1645.8 8533.65,1645.8 8933.65,1645.8 9333.65,1645.8 9733.65,1645.8 10133.65,1645.8 10533.65,1645.8 1933.64,1845.8 2333.64,1845.8 2733.64,1845.8 3133.64,1845.8 3533.64,1845.8 3933.64,1845.8 4333.64,1845.8 4733.64,1845.8 5133.64,1845.8 5533.64,1845.8 5933.64,1845.8 6533.65,1845.8 6933.65,1845.8 7333.65,1845.8 7733.65,1845.8 8133.65,1845.8 8533.65,1845.8 8933.65,1845.8 9333.65,1845.8 9733.65,1845.8 10133.65,1845.8 10533.65,1845.8 10606.25,1891.27 10806.25,1891.27 6351.23,1979 6573.23,1984 9129.23,1984 9720.23,1987 9633.23,1989 8915.23,1991 9343.23,1991 9429.23,1991 9909.23,1992 10142.23,1992 5826.23,1995 6050.23,1995 2573.23,1996 8400.23,1996 8615.23,1996 3551.23,2007 1910.23,2008 2886.23,2009 7080.23,2009 5545.23,2011 6955.23,2012 5323.23,2014 6835.23,2017 7356.23,2020 8129.23,2020 4011.23,2021 10450.23,2021 7595.23,2022 7859.23,2022 4928.23,2025 5035.23,2026 4503.23,2027 3268.23,2028 4298.23,2028 4813.23,2029 4401.23,2033 2754.23,2036 3027.23,2036 3428.23,2038 7993.23,2039 6464.23,2043 8509.23,2045 10035.23,2048 3790.23,2049 9006.23,2050 9533.23,2051 7476.23,2053 5936.23,2054 1767.23,2055 5436.23,2062 1633.02,2091.27 10606.25,2091.27 10806.25,2091.27 6048.23,2103 6563.23,2103 9651.23,2103 2816.23,2104 5839.23,2105 3359.23,2106 8408.23,2106 8614.23,2106 9119.23,2108 3965.23,2110 3848.23,2112 10129.23,2120 3501.23,2122 5526.23,2122 6354.23,2123 6954.23,2130 9916.23,2138 9414.23,2139 2519.23,2160 1670.23,2172 9518.23,2175 7849.23,2182 9266.23,2208 1594.23,2230 9955.23,2239 8589.23,2250 1995.23,2268 1636.02,2292.27 10609.25,2292.27 10809.25,2292.27 2037.23,2294 2081.9,2294.75 2125.39,2295.47 9263.23,2295 9917.23,2295 7949.23,2296 7490.23,2297 1846.23,2306 8583.23,2330 7914.23,2340 2290.56,2343.61 1599.23,2345 7487.23,2352 9262.23,2355 2344.23,2356 9957.23,2356 2070.23,2373 2246.23,2382 2344.23,2392 4173.23,2405 3944.23,2407 1809.23,2416 7752.23,2425 1622.23,2430 7035.23,2434 9932.23,2436 2429.23,2446 2464.23,2446 1773.23,2473 1636.03,2492.25 10609.26,2492.25 10809.26,2492.25 7001.23,2553 4126.23,2554 4076.23,2555 4126.23,2595 7281.23,2606 6343.23,2610 3676.23,2615 3634.23,2616 3717.23,2616 2287.23,2654 1636.02,2692.24 10609.25,2692.24 10809.25,2692.24 10509.23,2708 10510.23,2807 1636.02,2893.24 10609.25,2893.24 10809.25,2893.24 10510.23,2907 2489.23,2987 2259.23,2989 2921.23,2989 3509.23,3007 5550.23,3007 10150.23,3007 3003.23,3008 4009.23,3008 4535.23,3008 5057.23,3008 6063.23,3008 6569.23,3008 7072.23,3008 7573.23,3008 8610.23,3008 9110.23,3008 9648.23,3008 8109.23,3009 2483.23,3054 2257.23,3065 1636.02,3093.24 10609.25,3093.24 10809.25,3093.24 1933.63,3138.71 2333.63,3138.71 2733.63,3138.71 3133.63,3138.71 3533.63,3138.71 3933.63,3138.71 4333.63,3138.71 4733.63,3138.71 5133.63,3138.71 5533.63,3138.71 5933.63,3138.71 6533.64,3138.71 6933.64,3138.71 7333.64,3138.71 7733.64,3138.71 8133.64,3138.71 8533.64,3138.71 8933.64,3138.71 9333.64,3138.71 9733.64,3138.71 10133.64,3138.71 10533.64,3138.71 1933.63,3338.71 2333.63,3338.71 2733.63,3338.71 3133.63,3338.71 3533.63,3338.71 3933.63,3338.71 4333.63,3338.71 4733.63,3338.71 5133.63,3338.71 5533.63,3338.71 5933.63,3338.71 6533.64,3338.71 6933.64,3338.71 7333.64,3338.71 7733.64,3338.71 8133.64,3338.71 8533.64,3338.71 8933.64,3338.71 9333.64,3338.71 9733.64,3338.71 10133.64,3338.71 10533.64,3338.71
IN_U1: C4.1 R7.1 R10.1 U1.3 U1.5 | length 708.7
  Top Layer w10: U1.3@4559.43,2440.12 4522.93,2440.12 4501.43,2418.62 4501.43,2398.52 4521.93,2378.12 v2(4560.41,2378.09) 4560.43,2345.42 R10.1@4571.03,2334.72 ; U1.3@4564.34,2440.1 4605.33,2440.12 4618.53,2453.32 4618.53,2567.32 4622.23,2571.02 C4.1@4627.33,2571.02 ; R7.1@4784.83,2334.72 4796.63,2346.52 v2(4796.63,2378.09) 4796.63,2410.52 U1.5@4792.63,2414.52
  Bottom Layer w10: v2(4560.41,2378.09) v2(4796.63,2378.09)
IN_U2: C8.1 R17.1 R20.1 U2.3 U2.5 | length 722.4
  Top Layer w10: R20.1@5241.53,2334.82 5229.73,2346.62 v1(5229.7,2378.09) 5186.83,2378.12 5171.63,2393.42 5171.63,2431.22 5180.53,2440.12 U2.3@5233.64,2440.1 5268.33,2440.12 5285.53,2457.32 5285.53,2571.02 C8.1@5296.63,2571.02 ; R17.1@5454.13,2334.82 5465.93,2346.62 v1(5465.93,2378.09) 5465.93,2410.52 U2.5@5461.98,2414.5
  Bottom Layer w10: v1(5229.7,2378.09) v1(5465.93,2378.09)
IN_U3: C12.1 R27.1 R30.1 U3.3 U3.5 | length 719.4
  Top Layer w10: R30.1@5910.83,2334.72 5899.03,2346.62 v1(5899,2378.09) 5855.13,2378.12 5842.53,2390.62 5842.53,2429.62 5853.03,2440.12 U3.3@5902.94,2440.09 5935.33,2440.12 5953.53,2458.32 5953.53,2571.02 C12.1@5965.89,2571.02 ; R27.1@6123.43,2334.72 6135.23,2346.62 v1(6135.22,2378.09) 6135.23,2410.52 U3.5@6131.29,2414.49
  Bottom Layer w10: v1(5899,2378.09) v1(6135.22,2378.09)
IN_U4: C16.1 R37.1 R40.1 U4.3 U4.5 | length 716.9
  Top Layer w10: R40.1@6580.13,2334.72 6568.33,2346.52 v1(6568.29,2378.09) 6529.23,2378.12 6511.53,2395.72 6511.53,2426.42 6525.23,2440.12 U4.3@6572.25,2440.09 6609.33,2440.12 6624.53,2455.32 6624.53,2571.02 C16.1@6635.19,2571.02 ; R37.1@6792.73,2334.72 6804.53,2346.52 v1(6804.51,2378.09) 6804.53,2410.52 U4.5@6800.59,2414.49
  Bottom Layer w10: v1(6568.29,2378.09) v1(6804.51,2378.09)
IN_U5: C20.1 R47.1 R50.1 U5.3 U5.5 | length 698.6
  Top Layer w10: R50.1@8154.93,2334.72 8143.13,2346.62 v2(8143.09,2378.09) 8109.73,2378.12 8092.53,2395.22 8092.53,2424.22 8108.33,2440.12 U5.3@8147.02,2440.09 8186.33,2440.12 8210.03,2463.72 C20.1@8209.99,2571.02 ; R47.1@8367.53,2334.72 8379.33,2346.52 v2(8379.31,2378.09) 8379.33,2410.52 U5.5@8375.33,2414.52
  Bottom Layer w10: v2(8143.09,2378.09) v2(8379.31,2378.09)
IN_U6: C24.1 R57.1 R60.1 U6.3 U6.5 | length 703.9
  Top Layer w10: R60.1@8824.23,2334.72 8812.43,2346.62 v1(8812.38,2378.09) 8775.73,2378.12 8758.53,2395.22 8758.53,2423.22 8775.33,2440.12 U6.3@8816.34,2440.09 8854.33,2440.12 8879.33,2465.02 C24.1@8879.29,2571.02 ; R57.1@9036.83,2334.72 9048.63,2346.62 v1(9048.61,2378.09) 9048.63,2410.52 U6.5@9044.63,2414.52
  Bottom Layer w10: v1(8812.38,2378.09) v1(9048.61,2378.09)
IN_U7: C28.1 R67.1 R70.1 U7.3 U7.5 | length 692.2
  Top Layer w10: R70.1@9493.43,2334.82 9486.53,2341.72 9486.53,2378.12 9449.73,2378.12 9431.53,2396.22 9431.53,2428.22 9443.33,2440.12 U7.3@9485.6,2440.09 9528.33,2440.12 9548.63,2460.32 C28.1@9548.59,2571.02 ; R67.1@9706.03,2334.72 9713.93,2342.62 v1(9713.93,2378.09) U7.5@9713.93,2414.52
  Bottom Layer w10: v1@9486.55,2378.09 v1(9713.93,2378.09)
  other v1: 9486.55,2378.09
IN_U8: C32.1 R77.1 R80.1 U8.3 U8.5 | length 701.3
  Top Layer w10: R80.1@10162.83,2334.72 10162.83,2366.22 10153.53,2378.12 10115.73,2378.12 10099.53,2394.22 10099.53,2424.22 10115.33,2440.12 U8.3@10154.91,2440.08 10193.33,2440.12 10217.93,2464.62 C32.1@10217.89,2571.02 ; R77.1@10375.43,2334.72 10387.23,2346.62 v1(10387.19,2378.09) 10387.23,2410.52 U8.5@10383.23,2414.52
  Bottom Layer w10: v1(10150.96,2378.09) v1(10387.19,2378.09)
J2_1: D33.1 D34.2 J2.1 | length 357.1
  Top Layer w78.74: J2.1@1779.23,2177.22 1968.43,2177.22 D34.2@1971.23,2174.39 2040.23,2105.42 D33.1@2040.23,2039
LED3_1: LED3.1 R129.1 | length 70.3
  Top Layer w19.68: LED3.1@3040.23,2531 R129.1@3040.23,2601.34
LED4_1: LED4.1 R130.1 | length 67.3
  Top Layer w19.68: LED4.1@2930.23,2531 R130.1@2930.23,2598.34
LEDOUT: R137.1 U9.14 | length 741.3
  Top Layer w10: R137.1@2890.53,2239.02 2890.53,2268.32 v1(2925.23,2303) ; v1(3274.23,2303) 3293.23,2322.02 3293.23,2469.02 3332.43,2508.22 U9.14@3417.03,2508.22
  Bottom Layer w10: v1(2925.23,2303) v1(3274.23,2303)
LEVELOUT: R134.1 R135.1 R136.1 U9.15 | length 1853.8
  Top Layer w10: v1(2851.23,2336) 2851.23,2191.02 2868.23,2174.02 R136.1@2889.53,2174.02 ; v1(3268.23,2336) 3268.23,2495.02 3331.43,2558.22 U9.15@3417.03,2558.22
  Top Layer w19.68: R135.1@2232.23,2537.62 R134.1@2232.23,2627.34
  Bottom Layer w10: v1(2233.23,2584) 2260.23,2611.02 2712.23,2611.02 2851.23,2472.02 v1(2851.23,2336) v1(3268.23,2336)
OUT: J2.2 Q36.2 Q37.3 R138.1 R139.2 | length 814.9
  Top Layer w19.68: R138.1@2020.23,2528.62 2030.73,2539.22 Q36.2@2089.83,2539.2 2057.03,2539.22 v1(2056.23,2540) 2056.23,2653.22 Q37.3@2063.03,2660 2063.03,2724.42 R139.2@2100.53,2762.02
  Bottom Layer w19.68: J2.2@1779.22,2256.05 1895.28,2256.05 2056.23,2417 v1(2056.23,2540)
Q1_1: Q1.1 Q2.2 R82.1 | length 155.6
  Top Layer w19.68: Q2.2@2621.43,2785.57 2621.43,2848.52 2700.23,2848.52 R82.1@2710.03,2858.42
Q1_3: D17.2 Q1.3 Q2.3 | length 245.3
  Top Layer w19.68: D17.2@2415.53,2885.92 2523.03,2885.92 Q2.3@2523.03,2748.12
Q3_1: Q3.1 Q4.2 R85.1 | length 155.6
  Top Layer w19.68: Q4.2@3133.24,2785.57 3133.23,2848.52 3212.03,2848.52 R85.1@3221.83,2858.42
Q5_1: Q5.1 Q6.2 R88.1 | length 155.6
  Top Layer w19.68: Q6.2@3645.03,2785.62 3645.03,2848.52 3723.83,2848.52 R88.1@3733.63,2858.42
Q7_1: Q7.1 Q8.2 R91.1 | length 155.6
  Top Layer w19.68: Q8.2@4156.83,2785.62 4156.83,2848.52 4235.63,2848.52 R91.1@4245.43,2858.42
Q9_1: Q9.1 Q10.2 R94.1 | length 155.6
  Top Layer w19.68: Q10.2@4668.73,2785.52 4668.73,2848.52 4747.43,2848.52 R94.1@4757.23,2858.42
Q11_1: Q11.1 Q12.2 R97.1 | length 155.5
  Top Layer w19.68: Q12.2@5180.48,2785.57 5180.53,2848.52 5259.23,2848.52 R97.1@5269.03,2858.42
Q13_1: Q13.1 Q14.2 R100.1 | length 155.6
  Top Layer w19.68: Q14.2@5692.3,2785.57 5692.33,2848.52 5771.03,2848.52 R100.1@5780.93,2858.42
Q15_1: Q15.1 Q16.2 R103.1 | length 155.6
  Top Layer w19.68: Q16.2@6204.1,2785.57 6204.13,2848.52 6282.83,2848.52 R103.1@6292.73,2858.42
Q17_1: Q17.1 Q18.2 R106.1 | length 155.6
  Top Layer w19.68: Q18.2@6715.91,2785.57 6715.93,2848.52 6794.63,2848.52 R106.1@6804.53,2858.42
Q19_1: Q19.1 Q20.2 R109.1 | length 155.7
  Top Layer w19.68: Q20.2@7227.73,2785.57 Q19.1@7227.73,2848.57 ; Q19.1@7227.73,2848.52 7306.53,2848.52 R109.1@7316.33,2858.42
Q21_1: Q21.1 Q22.2 R112.1 | length 155.7
  Top Layer w19.68: Q22.2@7739.53,2785.52 7739.53,2848.52 7818.33,2848.52 R112.1@7828.13,2858.42
Q23_1: Q23.1 Q24.2 R115.1 | length 155.6
  Top Layer w19.68: Q24.2@8251.35,2785.57 8251.33,2848.52 8330.13,2848.52 R115.1@8339.93,2858.42
Q25_1: Q25.1 Q26.2 R118.1 | length 155.6
  Top Layer w19.68: Q26.2@8763.13,2785.62 8763.13,2848.52 8841.93,2848.52 R118.1@8851.73,2858.42
Q27_1: Q27.1 Q28.2 R121.1 | length 155.6
  Top Layer w19.68: Q28.2@9274.93,2785.62 9274.93,2848.52 9353.73,2848.52 R121.1@9363.53,2858.42
Q29_1: Q29.1 Q30.2 R124.1 | length 155.5
  Top Layer w19.68: Q30.2@9786.78,2785.57 9786.83,2848.52 9865.53,2848.52 R124.1@9875.33,2858.42
Q31_1: Q31.1 Q32.2 R127.1 | length 155.6
  Top Layer w19.68: Q32.2@10298.59,2785.57 10298.63,2848.52 10377.33,2848.52 R127.1@10387.23,2858.42
Q36_1: Q36.1 R135.2 | length 114.3
  Top Layer w19.68: Q36.1@2164.63,2539.2 2164.63,2502.62 2188.93,2478.32 R135.2@2232.23,2478.34
Q37_1: Q37.1 R134.2 | length 97.3
  Top Layer w19.68: Q37.1@2161.43,2622.6 2225.53,2686.62 R134.2@2232.23,2686.62
Q38_1: Q38.1 R136.2 R137.2 | length 186.6
  Top Layer w10: R136.2@2948.89,2174 2949.93,2175.02 R137.2@2949.89,2239 2949.93,2261.62 3012.83,2324.62 Q38.1@3022.43,2324.6
Q38_3: LED4.2 Q38.3 | length 111.6
  Top Layer w19.68: Q38.3@2924.03,2362 2930.23,2368.22 LED4.2@2930.23,2471
QD1: U9.16 U12.14 | length 567
  Top Layer w10: U9.16@3417.07,2608.2 v1@3505.03,2608.32 ; U12.14@3773.02,2457.81 3812.63,2457.82 v1@3836.03,2481.22
  Bottom Layer w10: v1(3505.07,2608.26) 3511.08,2608.28 3564.18,2555.18 3564.18,2516.19 3586.08,2494.28 3823.08,2494.28 v1(3836.07,2481.26)
QD2: U12.9 U13.14 | length 3713.1
  Top Layer w10: U12.9@3772.93,2329.92 3835.73,2329.92 3883.03,2377.22 v1@3906.03,2377.22 ; v1@7208.33,2551.22 7301.83,2457.82 U13.14@7355.69,2457.81
  Bottom Layer w10: v1(3906.07,2377.26) 4328.08,2377.28 4374.08,2423.28 6963.08,2423.28 7091.08,2551.29 v1@7208.39,2551.29
  other v1: 7208.33,2551.26
QD3: J1.1 U9.11 | length 1875.5
  Top Layer w10: v1(3308.23,2296) 3370.43,2358.22 U9.11@3417.03,2358.22
  Bottom Layer w10: J1.1@1913.53,2593.52 2087.73,2593.52 2110.23,2571.02 2110.23,2392.02 2302.23,2200.02 3278.23,2200.02 3308.23,2230.02 v1(3308.23,2296)
R2_2: C3.2 D2.2 R2.2 | length 1789.2
  Top Layer w39.37: R2.2@4784.83,2256.02 4826.63,2256.02 C3.2@4867.48,2256.02
  Bottom Layer w10: D2.2@3183.25,2098.55 3260.38,2098.59 3340.08,2178.28 4515.08,2178.28 4547.08,2210.28 4784.28,2210.28 v2(4826.16,2252.1)
R3_2: R3.2 R4.1 U1.2 | length 229.9
  Top Layer w10: R4.1@4442.33,2480.52 4453.93,2480.52 4478.03,2456.32 4515.03,2456.32 4524.63,2465.72 U1.2@4564.43,2465.72
  Top Layer w39.37: R3.2@4434.43,2571.02 4434.43,2488.32 R4.1@4442.33,2480.42
R4_2: C2.2 R4.2 R8.2 | length 230.4
  Top Layer w10: C2.2@4434.43,2256.02 4434.43,2283.62 4446.43,2295.72 4478.43,2295.72 4489.53,2306.82 4489.53,2334.72 4489.53,2378.12 R4.2@4442.33,2425.32